# EAGLE board Ultrasonico (EAGLE 9.6.2)
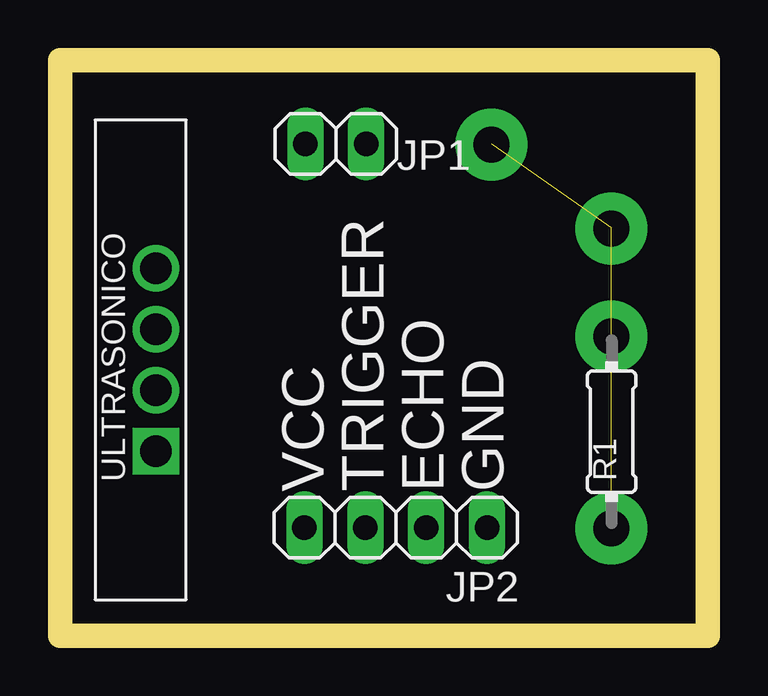
[diagram p0: board, top side]
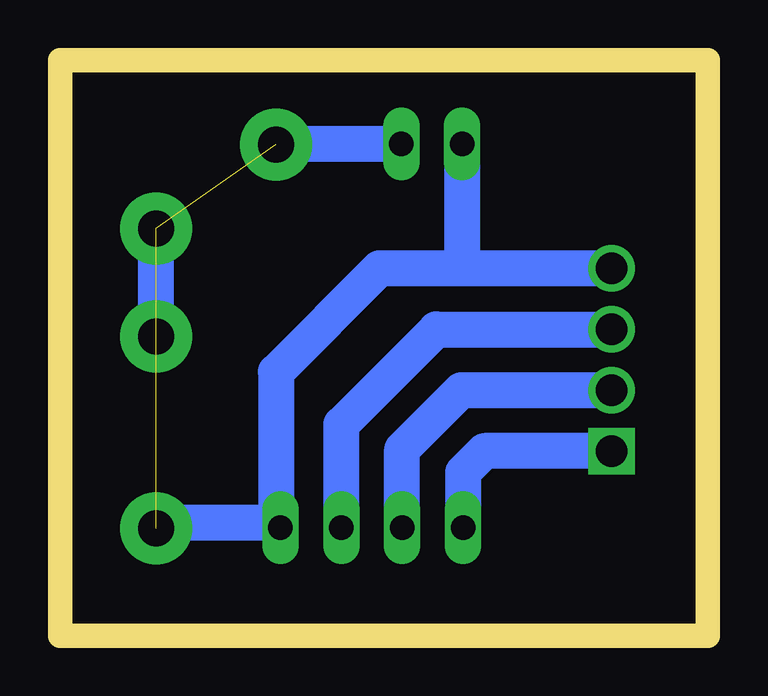
[diagram p1: board, bottom side, seen from below]

Size 27 x 24 mm. Coordinates in mm from the lower left corner, seen from the top.
Outline: 0,0 27,0 27,24 0,24 0,0
Copper layers (1*16): Top 0.035mm / dielectric 1.5mm / Bottom 0.035mm
Design rules "default": minimum track width 6mil, minimum drill 0.35mm, track to track 6mil, track to pad 6mil, pad to pad 6mil, via to via 6mil, smd to smd 6mil, copper to edge 40mil, drill to drill 6mil, minimum pad ring 10mil, minimum via ring 8mil, stop-mask expansion 4mil, vias tented up to drill 0mil, thermal gap 10mil

## Footprints (pad centres in the part's own frame; a part is rotated, then mirrored left to right if it is on the bottom)
1X02 = drill 1.016 long: 1 -1.27,0; 2 1.27,0
1X04 = drill 1.016 long: 1 -3.81,0; 2 -1.27,0; 3 1.27,0; 4 3.81,0
0204/7 = drill 0.813 octagon: 1 -3.81,0; 2 3.81,0
ULTRASONICO = drill 1.3: ECHO 1.27,0; GND 3.81,0; TRIG -1.27,0 | drill 1.3 square: VCC -3.81,0

## Placement (x,y rotation side)
JP1  [1X02]  11.5,20.5 180 top
JP2  [1X04]  14,4.5 180 top
R1  220  [0204/7]  23,8.5 90 top
U$1  ULTRASONICO  [ULTRASONICO]  4,11.5 90 top

## Library data of the parts
JP1 JP2 = pinhead
R1 = rcl; SPICEPREFIX: R
U$1 = MODULAR

## Nets
ECHO: JP2.2 U$1.ECHO
GND: JP1.2 JP2.1 R1.1 U$1.GND
PULSO-ULTRASONICO: JP1.1 R1.2
TRIGGER: JP2.3 U$1.TRIG
VCC: JP2.4 U$1.VCC

## Tracks (layer width: path | path; a pad name or v marks a point on that pad's centre or on a via)
ECHO
  Bottom 1.5: JP2.2 15.27,8.8 11.3,12.77 U$1.ECHO
GND
  Bottom 0.152: 10.23,15.54 10,15.31
  Bottom 1.5: U$1.GND 10,15.31 13.69,15.31 18,11 18,4.5 JP2.1 18,4.69 R1.1 | JP1.2 10.23,18.54 10.23,15.54
N$1  (via drill 1.5 pad 3)
  other vias: 17.98,20.46
PULSO-GALGA  (via drill 1.5 pad 3)  (2 unrouted)
  other vias: 22.98,16.96 22.98,12.46 22.98,4.46
PULSO-ULTRASONICO  (1 unrouted)
  Bottom 1.5: JP1.1 18,20.5 | R1.2 23,17
TRIGGER
  Bottom 1.5: JP2.3 12.73,7.77 10.27,10.23 U$1.TRIG
VCC
  Bottom 1.5: U$1.VCC 9.31,7.69 10.19,6.81 JP2.4

## Text on the board
tPlace: VCC | TRIGGER | ECHO | GND